# EAGLE board motor_driver (EAGLE 6.5.0)
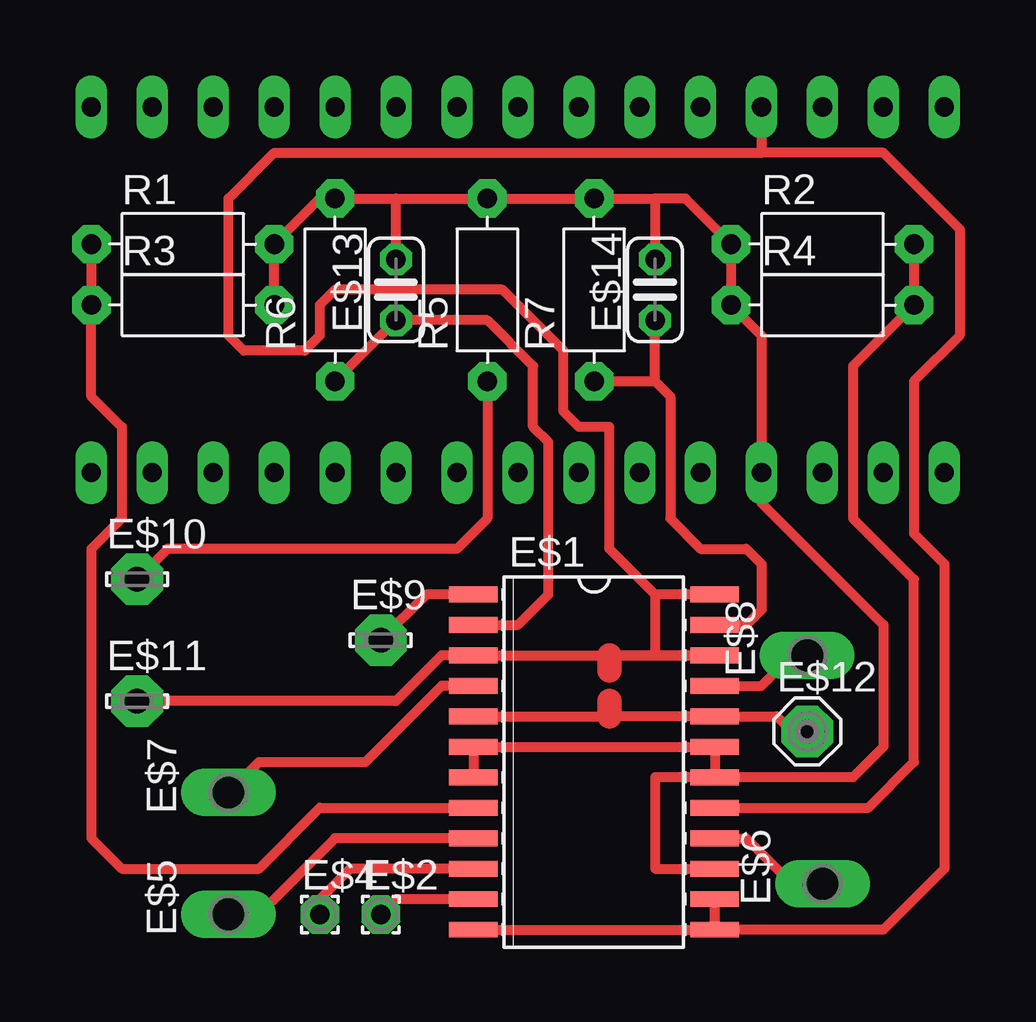
[diagram p0: board, top side]
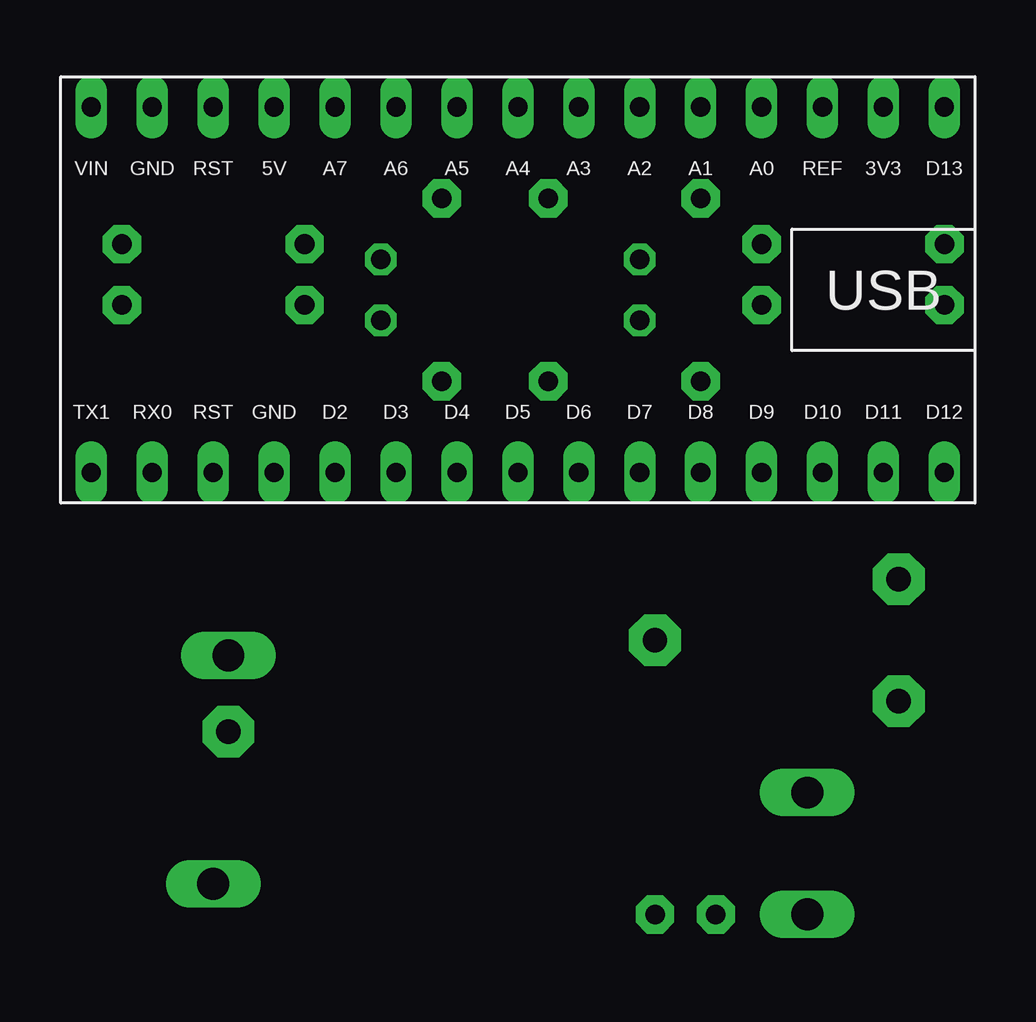
[diagram p1: board, bottom side, seen from below]

No outline drawn. Coordinates in mm, seen from the top.
Copper layers (1*16): Top 0.035mm / dielectric 1.5mm / Bottom 0.035mm
Design rules "default": minimum track width 10mil, minimum drill 24mil, track to track 8mil, track to pad 8mil, pad to pad 8mil, via to via 8mil, smd to smd 8mil, copper to edge 40mil, drill to drill 8mil, minimum pad ring 10mil, minimum via ring 8mil, stop-mask expansion 4mil, vias tented up to drill 0mil, thermal gap 10mil

## Footprints (pad centres in the part's own frame; a part is rotated, then mirrored left to right if it is on the bottom)
SO24R = smd 0.66 x 2.032: 1 -6.985,-5.029; 2 -5.715,-5.029; 3 -4.445,-5.029; 4 -3.175,-5.029; 5 -1.905,-5.029; 6 -0.635,-5.029; 7 0.635,-5.029; 8 1.905,-5.029; 9 3.175,-5.029; 10 4.445,-5.029; 11 5.715,-5.029; 12 6.985,-5.029; 13 6.985,5.029; 14 5.715,5.029; 15 4.445,5.029; 16 3.175,5.029; 17 1.905,5.029; 18 0.635,5.029; 19 -0.635,5.029; 20 -1.905,5.029; 21 -3.175,5.029; 22 -4.445,5.029; 23 -5.715,5.029; 24 -6.985,5.029
1,6/0,8 = drill 0.813 pad 1.6 octagon: 1 0,0
P1-13Y = drill 1.321 pad 1.905 long: TP 0,0
LSP10 = drill 1.016 pad 2.159 octagon: MP 0,0
MCS10B = drill 1.016 pad 2.159 octagon: MP 0,0
C025-024X044 = drill 0.813 octagon: 1 -1.27,0; 2 1.27,0
ARDUINO_NANO = drill 0.8 long: P$1 0,7.62; P$2 -2.54,7.62; P$3 -5.08,7.62; P$4 -7.62,7.62; P$5 -10.16,7.62; P$6 -12.7,7.62; P$7 -15.24,7.62; P$8 -17.78,7.62; P$9 2.54,7.62; P$10 5.08,7.62; P$11 7.62,7.62; P$12 10.16,7.62; P$13 12.7,7.62; P$14 15.24,7.62; P$15 17.78,7.62; P$16 -17.78,-7.62; P$17 -15.24,-7.62; P$18 -12.7,-7.62; P$19 -10.16,-7.62; P$20 -7.62,-7.62; P$21 -5.08,-7.62; P$22 -2.54,-7.62; P$23 0,-7.62; P$24 2.54,-7.62; P$25 5.08,-7.62; P$26 7.62,-7.62; P$27 10.16,-7.62; P$28 12.7,-7.62; P$29 15.24,-7.62; P$30 17.78,-7.62
R-7,5 = drill 0.813 pad 1.6 octagon: 1 -3.81,0; 2 3.81,0

## Placement (x,y rotation side)
E$1  [SO24R]  22.23,8.89 270 top
E$2  [1,6/0,8]  13.34,2.54 0 top
E$4  [1,6/0,8]  10.79,2.54 0 top
E$5  [P1-13Y]  6.99,2.54 90 top
E$6  [P1-13Y]  31.75,3.81 90 top
E$7  [P1-13Y]  6.99,7.62 90 top
E$8  [P1-13Y]  31.11,13.34 90 top
E$9  [LSP10]  13.34,13.97 0 top
E$10  [LSP10]  3.17,16.51 0 top
E$11  [LSP10]  3.17,11.43 0 top
E$12  [MCS10B]  31.11,10.16 0 top
E$13  [C025-024X044]  13.97,28.57 90 top
E$14  [C025-024X044]  24.77,28.57 90 top
E$15  [ARDUINO_NANO]  19.05,28.57 180 bottom
R1  1.2  [R-7,5]  5.08,30.48 0 top
R2  1.2  [R-7,5]  31.75,30.48 0 top
R3  1.2  [R-7,5]  5.08,27.94 0 top
R4  1.2  [R-7,5]  31.75,27.94 0 top
R5  1.2  [R-7,5]  17.78,28.57 90 top
R6  1.2  [R-7,5]  11.43,28.57 90 top
R7  1.2  [R-7,5]  22.23,28.57 90 top

## Library data of the parts
E$1 = analog-devices
E$2 E$4 = wirepad
E$5-E$8 = testpad
E$9-E$12 = solpad
E$13 E$14 = rcl
E$15 = eagle_llibrary
R1-R7 = discrete

## Nets
S$1: E$1.3 E$1.12 E$1.13 E$1.14 E$1.22 E$1.24 E$11.MP
S$2: E$1.10 E$4.1
S$3: E$1.1 E$9.MP
S$4: E$1.5 E$1.20 E$12.MP
S$5: E$1.6 E$1.7 E$1.15 E$1.18 E$1.19 E$13.2 E$14.2 R1.2 R2.1 R3.2 R4.1 R5.2 R6.2 R7.2
S$6: E$1.8 R1.1 R3.1
S$7: E$1.17 R2.2 R4.2
S$8: E$1.11 E$2.1
S$9: E$1.9 E$5.TP
S$10: E$1.16 E$6.TP
S$11: E$1.4 E$7.TP
S$12: E$1.21 E$8.TP
S$13: E$1.2 E$13.1 R6.1
S$14: E$1.23 E$14.1 R7.1
S$15: E$10.MP R5.1

## Tracks (layer width: path | path; a pad name or v marks a point on that pad's centre or on a via)
S$1
  Top 0.406: 24.77,15.88 24.77,13.34 E$1.22 22.86,13.34 E$1.3 15.88,13.34 13.97,11.43 E$11.MP | E$1.12 E$1.13 | E$1.13 E$1.14 | E$1.13 34.29,1.91 36.83,4.45 36.83,17.14 35.56,18.41 35.56,24.77 37.47,26.67 37.47,31.11 34.29,34.29 29.21,34.29 | 29.21,36.2 29.21,34.29 | E$1.24 24.77,15.88 | 24.77,15.88 22.86,17.78 22.86,22.86 21.59,22.86 20.95,23.5 20.95,26.04 18.41,28.57 11.43,28.57 10.79,27.94 10.79,26.67 10.16,26.04 7.62,26.04 6.99,26.67 6.99,32.38 8.89,34.29 29.21,34.29
  Top 1.016: 22.86,12.7 22.86,13.34
S$2
  Top 0.406: E$1.10 12.06,4.45 10.79,3.17 E$4.1
S$3
  Top 0.406: E$1.1 15.24,15.88 E$9.MP
S$4
  Top 0.406: E$1.5 22.86,10.79 E$1.20 29.84,10.79 30.48,10.16 E$12.MP
  Top 1.016: 22.86,11.43 22.86,10.79
S$5
  Top 0.406: E$1.7 E$1.6 E$1.19 E$1.18 | E$1.18 24.77,8.26 24.77,4.45 E$1.15 | E$1.18 33.02,8.26 34.29,9.53 34.29,14.61 29.21,19.68 29.21,26.67 R4.1 R2.1 26.04,32.38 24.77,32.38 | R3.2 R1.2 10.79,32.38 R6.2 13.97,32.38 | E$13.2 13.97,32.38 | 13.97,32.38 R5.2 R7.2 24.77,32.38 | 24.77,32.38 E$14.2
S$6
  Top 0.406: E$1.8 10.79,6.99 8.26,4.45 2.54,4.45 1.27,5.71 1.27,17.78 2.54,19.05 2.54,22.86 1.27,24.13 R3.1 R1.1
S$7
  Top 0.406: E$1.17 33.66,6.99 35.56,8.89 35.56,16.51 33.02,19.05 33.02,25.4 R4.2 R2.2
S$8
  Top 0.406: E$1.11 13.97,3.17 E$2.1
S$9
  Top 0.406: E$1.9 11.43,5.71 8.26,2.54 E$5.TP
S$10
  Top 0.406: E$1.16 28.57,5.71 30.48,3.81 E$6.TP
S$11
  Top 0.406: E$1.4 15.88,12.06 12.7,8.89 8.26,8.89 E$7.TP
S$12
  Top 0.406: E$1.21 29.21,12.06 30.48,13.34 E$8.TP
S$13
  Top 0.406: E$1.2 19.05,14.61 20.32,15.88 20.32,22.23 19.68,22.86 19.68,25.4 17.78,27.3 E$13.1 R6.1
S$14
  Top 0.406: 24.77,24.77 25.4,24.13 25.4,19.05 26.67,17.78 28.57,17.78 29.21,17.14 29.21,15.24 28.57,14.61 E$1.23 | R7.1 24.77,24.77 | 24.77,24.77 E$14.1
S$15
  Top 0.406: R5.1 17.78,19.05 16.51,17.78 4.45,17.78 E$10.MP
S$16
  Top 0.406: 27.3,13.34 22.86,13.34